# Allegro board backup.brd
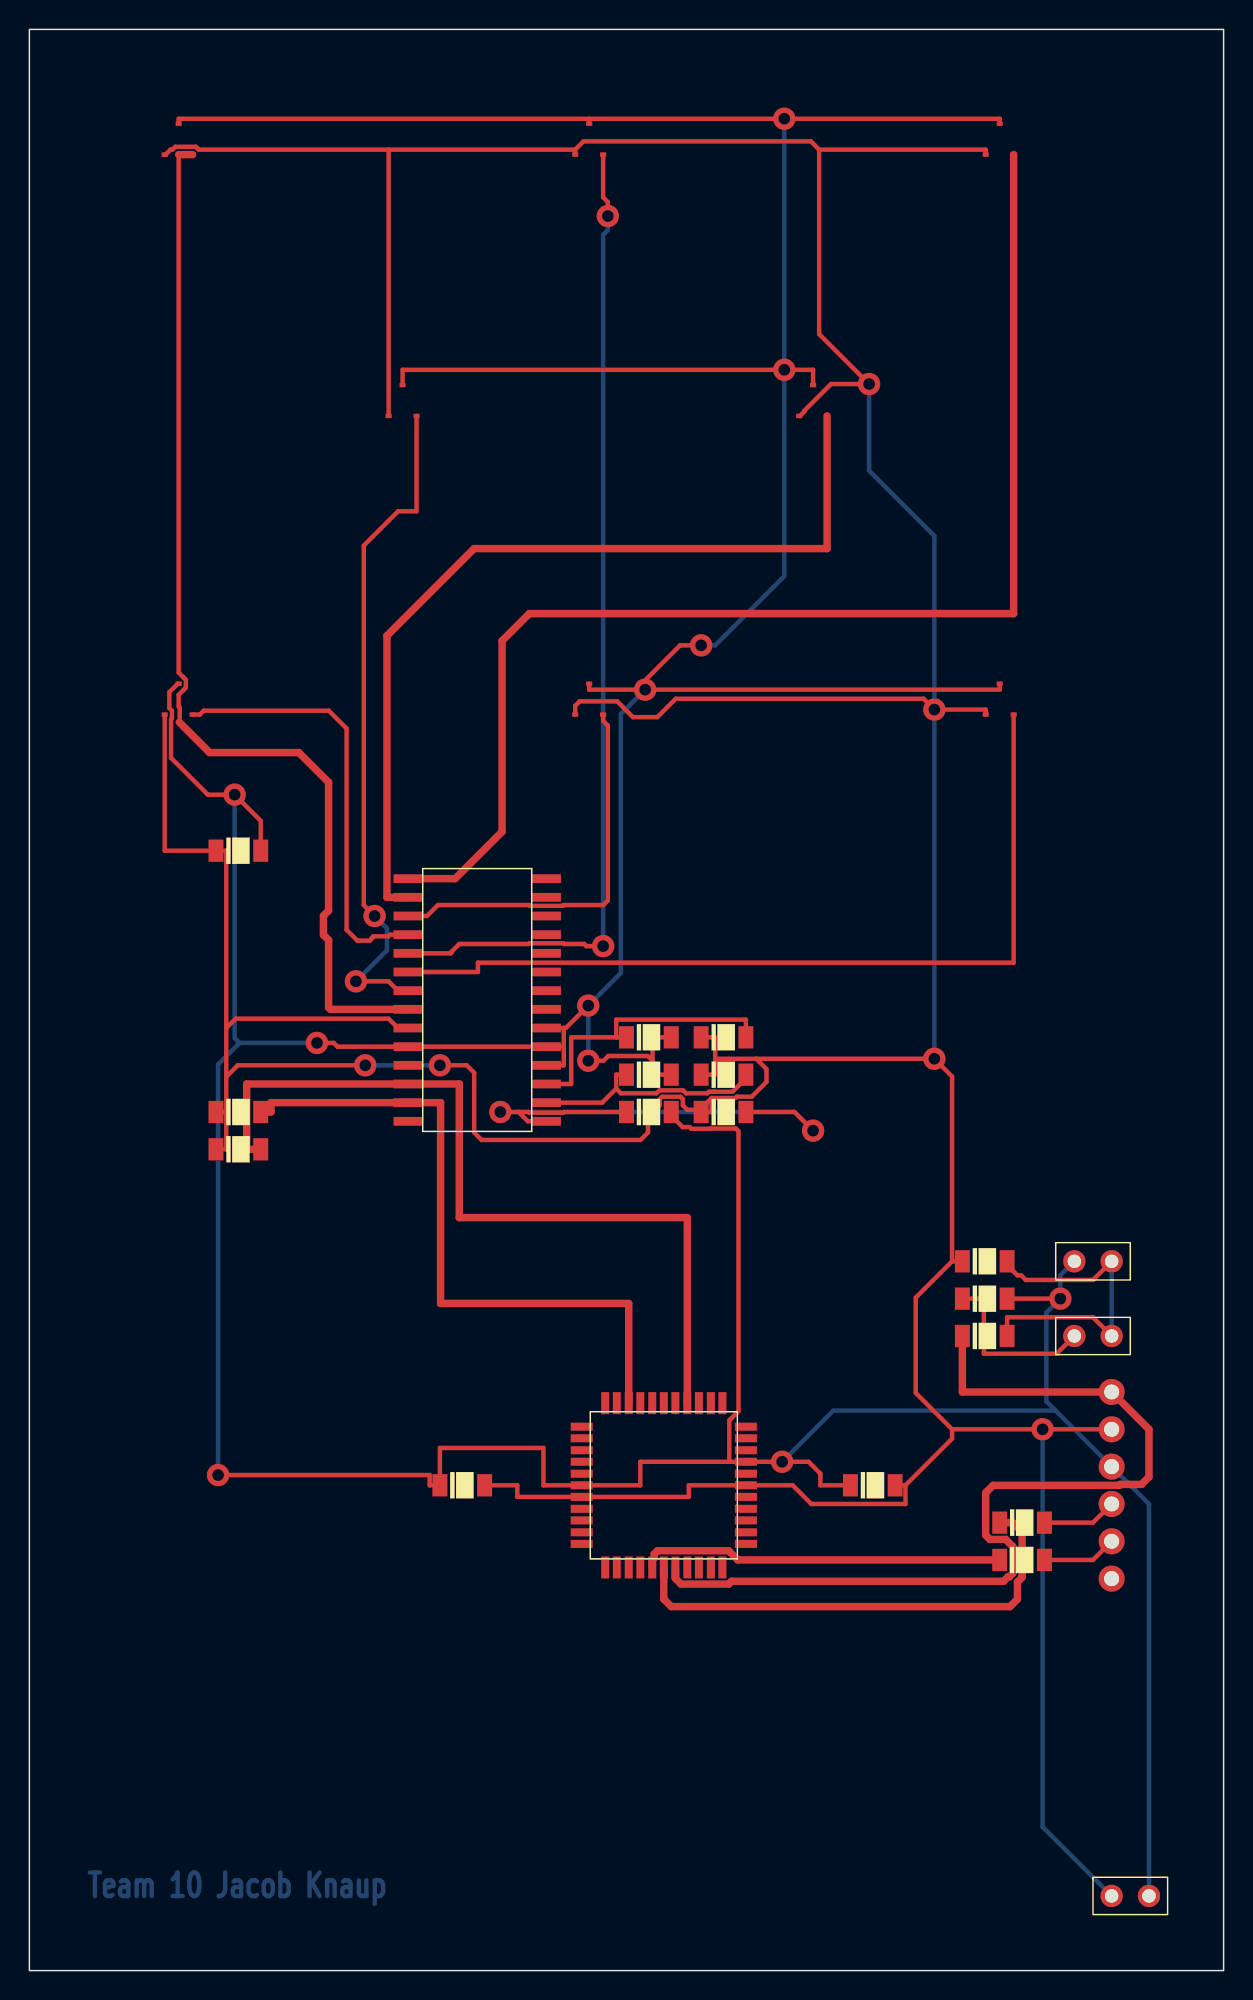
[diagram p0: board, top side]
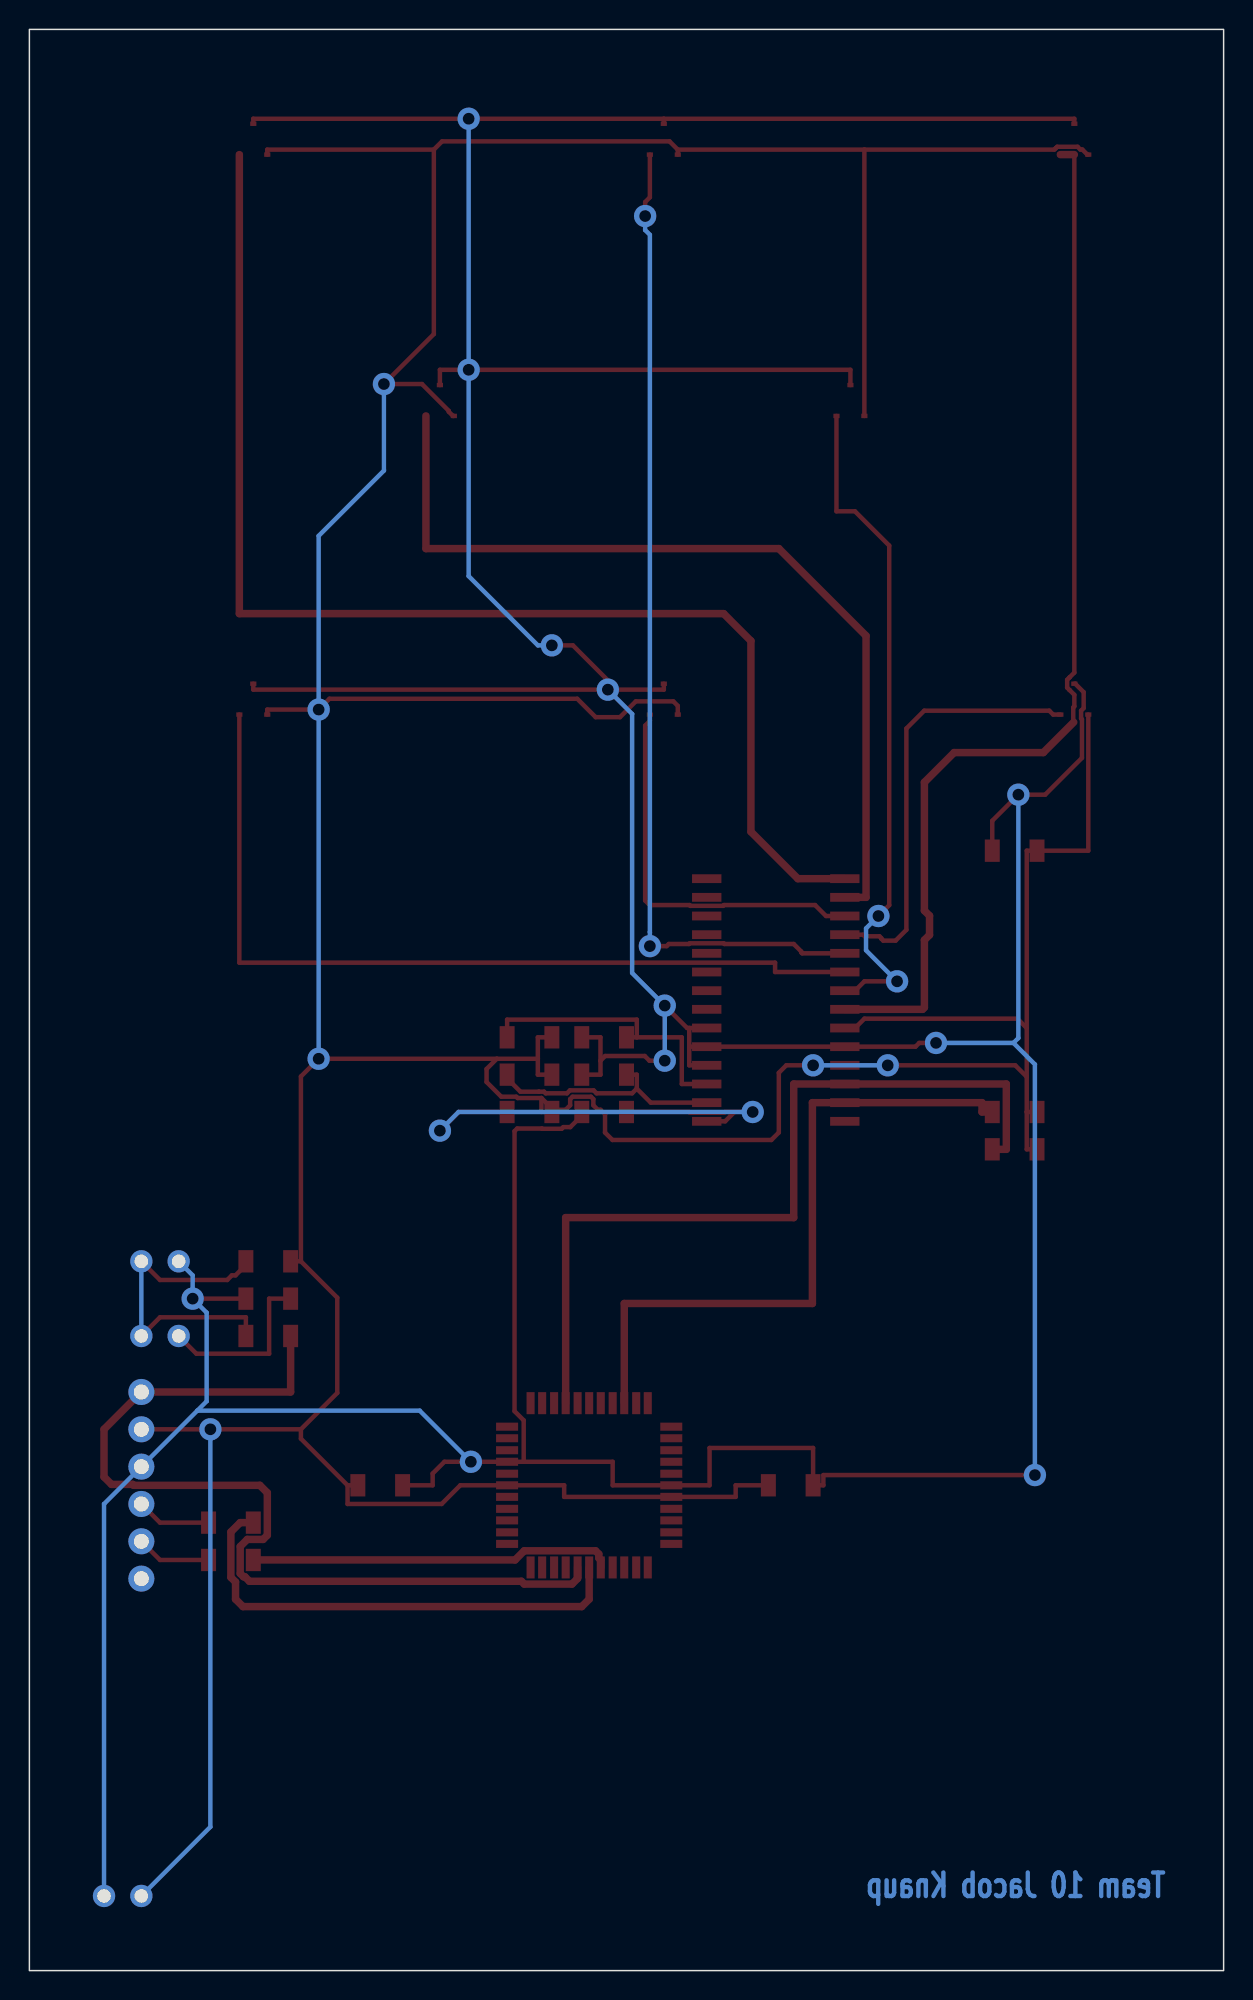
[diagram p1: board, bottom side, seen from below]

Outline 81.28 x 132.08 mm; copper layers: TOP, BOTTOM. Coordinates in mm from the lower left corner of the outline.
Outline path: rectangle 0,0 81.28,132.08

## Placement (name value [footprint] x y rotation side)
C1  0.1 uF  [1206]  12.7 76.2 0 top
C2  0.1 uF  [1206]  27.94 33.02 0 top
C3  0.1 uF  [1206]  55.88 33.02 0 top
C4  0.1 uF  [1206]  63.5 45.72 0 top
J1  JUMPER  [JUMPER2]  71.12 43.18 0 top
J2  CON2  [JUMPER2]  73.66 5.08 0 top
J3  CON6  [HEADER1X6]  73.66 38.1 0 top
J4  JUMPER  [JUMPER2]  71.12 48.26 0 top
R1  220 ohm  [1206]  63.5 43.18 0 top
R2  10 kohm  [1206]  63.5 48.26 0 top
R3  22 ohm  [1206]  66.04 27.94 0 top
R4  22 ohm  [1206]  66.04 30.48 0 top
R5  1 kohm  [1206]  12.7 58.42 0 top
R6  1 kohm  [1206]  12.7 55.88 0 top
R10  1 kohm  [1206]  45.72 63.5 0 top
R11  0 ohm  [1206]  40.64 63.5 0 top
R12  0 ohm  [1206]  40.64 60.96 0 top
R13  0 ohm  [1206]  40.64 58.42 0 top
R14  1 kohm  [1206]  45.72 60.96 0 top
R15  1 kohm  [1206]  45.72 58.42 0 top
U2  MCP23017T  [MCP23017]  30.48 66.04 0 top
U3  PIC18F47K40-I/PT  [TQFPPIC18F47K40]  43.18 33.02 0 top
U4  -  [TCS40DPR]  66.04 86.36 0 top
U5  -  [TCS40DPR]  38.1 124.46 0 top
U6  -  [TCS40DPR]  10.16 86.36 0 top
U7  -  [TCS40DPR]  38.1 86.36 0 top
U8  -  [TCS40DPR]  53.34 106.68 0 top
U9  -  [TCS40DPR]  25.4 106.68 0 top
U10  -  [TCS40DPR]  10.16 124.46 0 top
U11  -  [TCS40DPR]  66.04 124.46 0 top

## Library data of the parts
C1-C4 = CAP NP
J1 J4 = JUMPER
J2 = CON2: User Part Number: ***
J3 = CON6
R1-R6 R10-R15 = R
U2 = MCP23017T
U3 = PIC18F47K40-I/PT
U4-U11 = TCS40DPR

## Footprints (pads in the part's own frame, mm; a bottom-side part is the same pattern mirrored in y, then rotated)
1206
  rect 1.02x1.52 smd: 1(0,0) 2(3.045,0)
HEADER1X6
  round 1.778 hole 1.016: 1(0,1.27) 2(0,-1.27) 3(0,-3.81) 4(0,-6.35) 5(0,-8.89) 6(0,-11.43)
JUMPER2
  round 1.524 hole 0.914: 1(0,0) 2(2.54,0)
MCP23017
  rect 2x0.6 smd: 1(-4.699,8.255) 2(-4.699,6.985) 3(-4.699,5.715) 4(-4.699,4.445) 5(-4.699,3.175) 6(-4.699,1.905) 7(-4.699,0.635) 8(-4.699,-0.635) 9(-4.699,-1.905) 10(-4.699,-3.175) 11(-4.699,-4.445) 12(-4.699,-5.715) 13(-4.699,-6.985) 14(-4.699,-8.255) 15(4.699,-8.255) 16(4.699,-6.985) 17(4.699,-5.715) 18(4.699,-4.445) 19(4.699,-3.175) 20(4.699,-1.905) 21(4.699,-0.635) 22(4.699,0.635) 23(4.699,1.905) 24(4.699,3.175) 25(4.699,4.445) 26(4.699,5.715) 27(4.699,6.985) 28(4.699,8.255)
TCS40DPR
  rect 0.42x0.3 smd: 1(-0.95,-0.9) 2(0.95,-0.9) 3(0,1.2)
TQFPPIC18F47K40
  rect 1.5x0.55 smd: 1(-5.588,3.988) 2(-5.588,3.2) 3(-5.588,2.388) 4(-5.588,1.6) 5(-5.588,0.787) 6(-5.588,0) 7(-5.588,-0.787) 8(-5.588,-1.6) 9(-5.588,-2.388) 10(-5.588,-3.2) 11(-5.588,-3.988) 23(5.588,-3.988) 24(5.588,-3.2) 25(5.588,-2.388) 26(5.588,-1.6) 27(5.588,-0.787) 28(5.588,0) 29(5.588,0.787) 30(5.588,1.6) 31(5.588,2.388) 32(5.588,3.2) 33(5.588,3.988)
  rect 0.55x1.5 smd: 12(-3.988,-5.588) 13(-3.2,-5.588) 14(-2.388,-5.588) 15(-1.6,-5.588) 16(-0.787,-5.588) 17(0,-5.588) 18(0.787,-5.588) 19(1.6,-5.588) 20(2.388,-5.588) 21(3.2,-5.588) 22(3.988,-5.588) 34(3.988,5.588) 35(3.2,5.588) 36(2.388,5.588) 37(1.6,5.588) 38(0.787,5.588) 39(0,5.588) 40(-0.787,5.588) 41(-1.6,5.588) 42(-2.388,5.588) 43(-3.2,5.588) 44(-3.988,5.588)

## Nets
GND: C1.2 C2.1 C3.1 C4.2 J2.2 J3.3 J4.1 R11.2 R12.2 R13.2 U2.10(VSS) U2.18(RESET) U2.19(INTB) U2.20(INTA) U3.6(VSS_0) U3.30(VSS_1) U4.3(GND) U5.3(GND) U6.3(GND) U7.3(GND) U8.3(GND) U9.3(GND) U10.3(GND) U11.3(GND)
5 V: C1.1 C2.2 C3.2 J2.1 J3.2 R2.1 R5.1 R6.1 R10.1 R14.1 R15.1 U2.9(VDD) U3.7(VDD_0) U3.28(VDD_1) U4.1(VCC) U5.1(VCC) U6.1(VCC) U7.1(VCC) U8.1(VCC) U9.1(VCC) U10.1(VCC) U11.1(VCC)
ICSPCLK: R3.1 U3.16(ICSPCLK/RB6)
ICSPDAT: R4.1 U3.17(ICSPDAT/RB7)
MCLR/VPP: J3.1 R1.1 U3.18(VPP/MCLR/RE3)
SCK: R6.2 U2.12(SCK) U3.37(RC3)
SDA: R5.2 U2.13(SDA) U3.42(RC4)
N08393: J3.4 R4.2
N08402: J3.5 R3.2
N10205: J1.2 J4.2 R1.2 R2.2
N10837: C4.1 J1.1
N15182: U2.8(GPB7) U10.2(VOUT)
N15194: U2.7(GPB6) U9.2(VOUT)
N15206: U2.6(GPB5) U4.2(VOUT)
N15218: U2.5(GPB4) U5.2(VOUT)
N15230: U2.4(GPB3) U6.2(VOUT)
N15242: U2.3(GPB2) U7.2(VOUT)
N15254: U2.2(GPB1) U8.2(VOUT)
N15266: U2.1(GPB0) U11.2(VOUT)
N15788: U2.21(GPA0)
N15792: U2.22(GPA1)
N15796: U2.23(GPA2)
N15800: U2.24(GPA3)
N15804: U2.25(GPA4)
N15808: U2.26(GPA5)
N15816: U2.27(GPA6)
N16476: U2.28(GPA7)
N18763: R12.1 R14.2 U2.16(A1)
N18767: R13.1 R15.2 U2.15(A0)
N19228: R10.2 R11.1 U2.17(A2)

Pads without a net: J3 6; U2 11 14; U3 1 2 3 4 5 8 9 10 11 12 13 14 15 19 20 21 22 23 24 25 26 27 29 31 32 33 34 35 36 38 39 40 41 43 44

## Via types
v1: diameter 1.524, hole 0.8, TOP to BOTTOM, 23 vias

## Routing (per net, layer and track width the routed paths; a pad name or vN(x,y) marks a point on that pad's centre or on a via; arc(x,y) is an arc through that point)
GND: length 438.6
  TOP w0.305: U2.18 36.37,61.59 36.37,62.87 ; v1(12.84,33.72) 27.24,33.72 27.24,33.02 C2.1 27.94,35.56 34.99,35.56 34.99,33.02 U3.6 41.58,33.02 41.58,34.62 47.63,34.62 ; U6.3 10.1,87.56 9.53,86.98 9.53,85.9 9.7,85.73 9.7,85.19 9.64,85.14 9.64,82.51 12.14,80.01 v1(13.97,80.01) 15.74,78.24 C1.2 ; 42.41,61.91 42.41,60.96 R12.2 ; 42.41,61.91 42.41,63.5 R11.2 ; 42.41,61.91 42.09,62.23 39.4,62.23 39.08,61.91 v1(38.04,61.91) ; 36.37,62.87 U2.19 U2.10 20.97,62.87 20.72,63.12 v1(19.57,63.12) ; 36.37,62.87 36.37,64.13 ; 38.1,126 U5.3 ; 38.1,126 v1(51.38,126) 66.04,126 U11.3 ; 38.1,126 10.16,126 U10.3 ; 41.28,87.16 44.29,90.17 v1(45.72,90.17) ; 41.28,87.16 v1(41.91,87.16) 66.04,87.16 U4.3 ; 41.28,87.16 38.1,87.16 U7.3 ; 47.63,34.62 47.64,34.62 47.64,37.44 48.26,38.06 48.26,57.12 48.08,57.29 46.4,57.29 46.39,57.28 45.05,57.28 44.94,57.39 44.46,57.39 43.68,58.17 R13.2 ; 47.63,34.62 U3.30 v1(51.23,34.62) 53.03,34.62 53.83,33.82 53.83,33.02 C3.1 ; U2.20 36.37,64.13 ; 36.37,64.13 36.51,64.13 v1(38.04,65.66) ; U8.3 53.34,108.92 v1(51.38,108.92) 25.4,108.92 U9.3 ; C4.2 v1(70.17,45.72)
  BOTTOM w0.305: 69.85,38.1 54.71,38.1 v1(51.23,34.62) ; 69.85,38.1 69.22,38.73 69.22,44.77 v1(70.17,45.72) 70.17,47.31 J4.1 ; 69.85,38.1 J3.3 76.2,31.75 J2.2 ; v1(13.97,80.01) 13.97,63.45 14.3,63.12 ; v1(51.38,126) v1(51.38,108.92) 51.38,94.88 46.67,90.17 v1(45.72,90.17) ; v1(38.04,61.91) v1(38.04,65.66) 40.26,67.88 40.26,85.5 v1(41.91,87.16) ; v1(19.57,63.12) 14.3,63.12 ; 14.3,63.12 12.84,61.66 v1(12.84,33.72)
5 V: length 403.6
  TOP w0.305: 62.8,36.83 60.33,39.3 60.33,45.79 62.8,48.26 ; 62.8,36.83 v1(68.96,36.83) J3.2 ; 62.8,36.83 62.8,36.19 59.63,33.02 ; 13.4,64.13 13.4,60.82 ; 13.4,64.13 14.04,64.77 24.45,64.77 25.08,64.13 U2.9 ; 13.4,64.13 13.4,76.2 C1.1 9.21,76.2 U6.1 ; 13.4,60.82 13.4,58.42 ; 13.4,60.82 14.18,61.59 v1(22.86,61.59) 22.91,61.64 ; 62.8,48.26 62.8,60.84 v1(61.59,62.04) 49.47,62.04 ; 62.8,48.26 R2.1 ; 46.67,62.04 46.67,60.96 R14.1 ; 46.67,62.04 49.47,62.04 ; 46.67,62.04 46.67,63.5 R10.1 ; U8.1 52.45,105.78 52.73,106.07 52.73,106.13 54.56,107.95 v1(57.15,107.95) 53.75,111.35 53.75,123.9 ; 49.47,62.04 50.16,61.34 50.16,60.46 49.16,59.46 48.14,59.46 48.05,59.37 46.43,59.37 ; 53.75,123.9 65.09,123.9 U11.1 ; 53.75,123.9 53.19,124.46 37.71,124.46 37.15,123.9 ; 13.4,58.42 R5.1 ; 13.4,58.42 13.4,55.88 R6.1 ; U10.1 9.27,123.56 9.62,123.91 9.75,123.91 9.94,124.09 11.33,124.09 11.44,123.99 11.52,123.9 24.45,123.9 ; 37.15,123.9 U5.1 ; 37.15,123.9 24.45,123.9 ; 59.63,33.02 C3.2 ; 59.63,33.02 59.63,31.75 53.22,31.75 51.95,33.02 U3.28 44.88,33.02 44.88,32.23 U3.7 33.21,32.23 33.21,33.02 C2.2 ; 24.45,123.9 U9.1 ; 46.43,59.37 45.63,58.57 44.78,58.57 44.47,58.88 44.47,59.3 44.31,59.46 43.06,59.46 42.9,59.3 42.9,58.88 42.59,58.57 42.41,58.57 42.1,58.27 42.1,57.02 41.59,56.51 30.78,56.51 30.27,57.02 30.27,61.09 29.77,61.59 v1(27.94,61.59) 27.89,61.55 ; 46.43,59.37 46.43,58.42 R15.1 ; U7.1 37.15,86.06 37.45,86.36 40.01,86.36 41.08,85.28 42.74,85.28 43.99,86.54 60.86,86.54 v1(61.59,85.8) 65.09,85.8 U4.1
  BOTTOM w0.305: v1(57.15,107.95) 57.15,102.06 61.59,97.62 v1(61.59,85.8) v1(61.59,62.04) ; J2.1 68.96,9.78 v1(68.96,36.83) ; v1(27.94,61.59) v1(22.86,61.59)
ICSPCLK: length 24.8
  TOP w0.508: U3.16 42.39,27.94 42.52,28.07 42.52,28.34 42.75,28.56 47.6,28.56 48.22,27.94 R3.1
ICSPDAT: length 33.1
  TOP w0.508: U3.17 43.18,25.27 43.69,24.76 66.74,24.76 67.25,25.27 67.25,26.44 67.57,26.76 67.57,29.84 66.93,30.48 R4.1
MCLR/VPP: length 63.4
  TOP w0.508: U3.18 43.97,26.68 44.35,26.3 47.6,26.3 47.79,26.49 66.31,26.49 66.61,26.8 66.71,26.8 66.93,27.02 66.93,28.86 66.45,29.34 65.37,29.34 65.09,29.63 65.09,32.51 65.59,33.02 74.19,33.02 74.25,33.08 75.69,33.08 76.2,33.59 76.2,36.83 J3.1 63.5,39.37 R1.1
SCK: length 57.1
  TOP w0.508: U3.37 44.78,51.23 29.26,51.23 29.26,60.32 U2.12 14.79,60.32 14.79,55.88 R6.2
SDA: length 46.1
  TOP w0.508: U3.42 40.79,45.39 27.99,45.39 27.99,59.06 16.45,59.06 16.45,58.42 R5.2
N08393: length 5.1
  TOP w0.305: J3.4 72.39,30.48 R4.2
N08402: length 5.1
  TOP w0.305: J3.5 72.39,27.94 R3.2
N10205: length 22.3
  TOP w0.305: R2.2 66.54,48.01 67.25,47.3 67.5,47.3 67.81,46.99 72.39,46.99 J4.2 ; R1.2 66.54,44.45 72.39,44.45 J1.2
  BOTTOM w0.305: J4.2 J1.2
N10837: length 11.9
  TOP w0.305: J1.1 69.91,41.97 64.96,41.97 64.96,45.72 C4.1
N15182: length 73
  TOP w0.305: 10.2,84.94 10.23,84.97 10.23,85.95 10.16,86.02 10.16,86.81 10.49,87.13 10.65,87.29 10.65,87.83 10.49,87.99 10.16,88.31 10.16,123.56
  TOP w0.508: U2.8 20.49,65.41 20.37,65.53 20.37,70.12 20.02,70.47 20.02,71.77 20.37,72.12 20.37,80.85 18.34,82.88 12.27,82.88 10.2,84.94 ; 10.16,123.56 U10.2
N15194: length 46
  TOP w0.305: U2.7 25.08,66.67 24.45,67.31 v1(22.22,67.31) ; v1(23.49,71.75) 22.76,72.49 22.76,96.96 25.09,99.29 26.35,99.29 U9.2
  BOTTOM w0.305: v1(22.22,67.31) 24.34,69.42 24.34,70.91 v1(23.49,71.75)
N15206: length 58.7
  TOP w0.305: U2.6 30.53,67.94 30.53,68.58 66.99,68.58 U4.2
N15218: length 67.8
  TOP w0.305: v1(39.37,119.38) 39.37,120.33 39.05,120.65 U5.2 ; v1(39.05,69.71) 37.91,69.71 37.76,69.85 36.38,69.85 36.34,69.9 34.02,69.9 33.98,69.85 29.26,69.85 28.75,69.34 28.75,69.28 28.69,69.22 U2.5
  BOTTOM w0.305: v1(39.37,119.38) 39.37,118.43 39.05,118.11 39.05,70.66 v1(39.05,69.71)
N15230: length 29.5
  TOP w0.305: U2.4 24.54,70.48 24.42,70.37 23.42,70.37 23.3,70.25 23.3,70.21 23.17,70.08 22.33,70.08 21.59,70.81 21.59,84.51 20.38,85.72 11.86,85.72 11.6,85.46 U6.2
N15242: length 26.9
  TOP w0.305: U2.3 27.06,71.75 27.8,72.5 34.01,72.5 34.06,72.45 36.29,72.45 36.35,72.5 39.07,72.5 39.37,72.8 39.37,84.71 39.05,85.03 U7.2
N15254: length 60.7
  TOP w0.508: U2.2 24.34,73.03 24.34,90.82 30.27,96.75 54.29,96.75 U8.2
N15266: length 87.5
  TOP w0.508: U2.1 28.98,74.29 32.17,77.49 32.17,90.47 34.03,92.33 66.99,92.33 U11.2
N18763: length 16.6
  TOP w0.305: 39.94,60.01 38.98,59.06 35.18,59.06 ; 39.94,60.01 39.94,60.96 R12.1 ; 39.94,60.01 40.26,59.69 42.68,59.69 42.88,59.89 44.49,59.89 44.69,59.69 46.14,59.69 46.25,59.8 46.61,59.8 47.86,59.8 48.76,60.71 R14.2
N18767: length 37.7
  TOP w0.305: R13.1 36.38,58.42 36.34,58.37 34.02,58.37 33.98,58.42 33.29,58.42 ; v1(53.34,57.15) 52.07,58.42 R15.2 ; 33.29,58.42 33.93,57.78 U2.15 ; 33.29,58.42 v1(32.05,58.42)
  BOTTOM w0.305: v1(53.34,57.15) 52.07,58.42 v1(32.05,58.42)
N19228: length 19.9
  TOP w0.305: U2.17 36.88,60.32 36.88,63.5 39.94,63.5 ; 39.94,63.5 R11.1 ; 39.94,63.5 39.94,64.7 48.76,64.7 R10.2

## Text on the board
BOTTOM: Team 10 Jacob Knaup
